# Altium PCB PCB_2020-02-17 18-44-55.pcbdoc
Units mm, origin at the board's own origin, x right, y up, seen from the top; angles counter-clockwise.
Board outline 88.52 x 69.47 mm, 2 copper layers (Top Layer, Bottom Layer); 12 components, 24 nets, 56 pads, 9 vias.
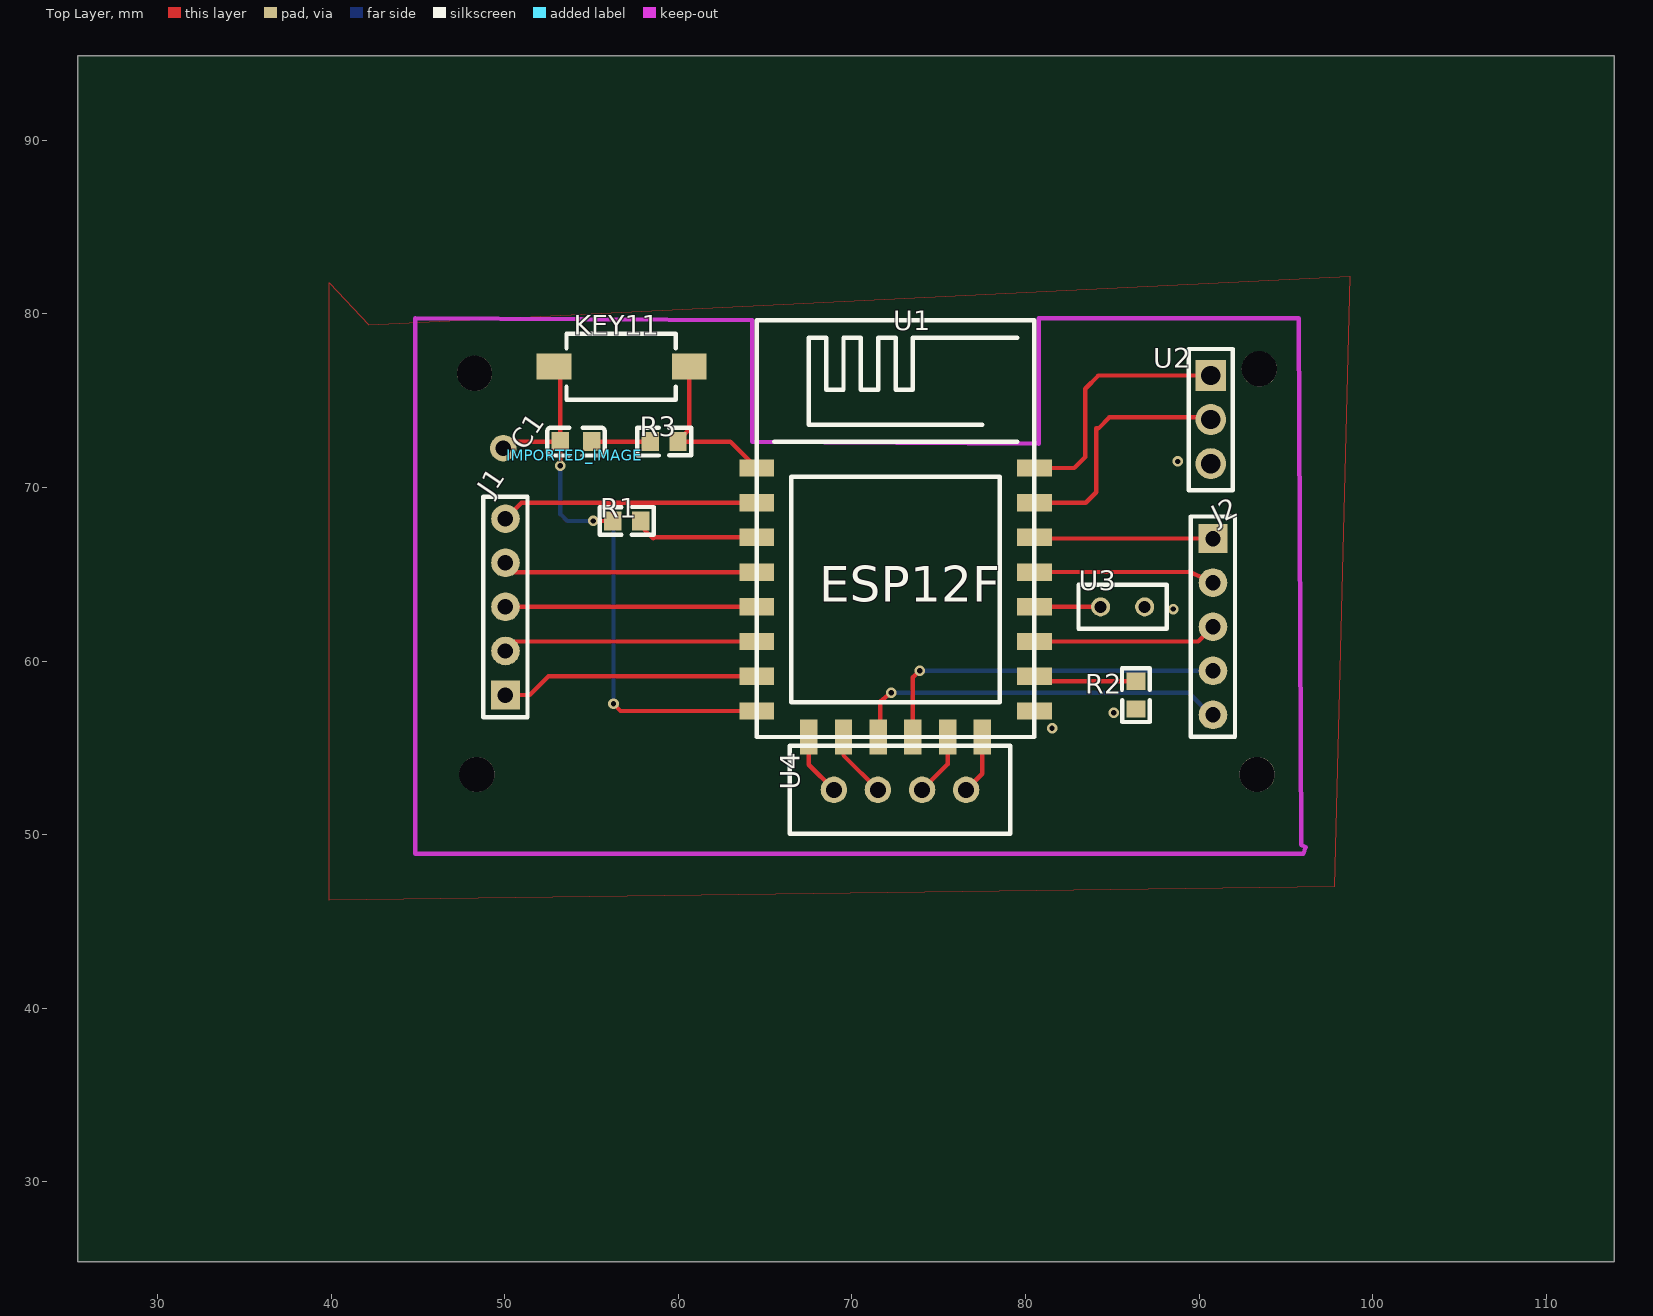
[diagram p0: Top Layer view]
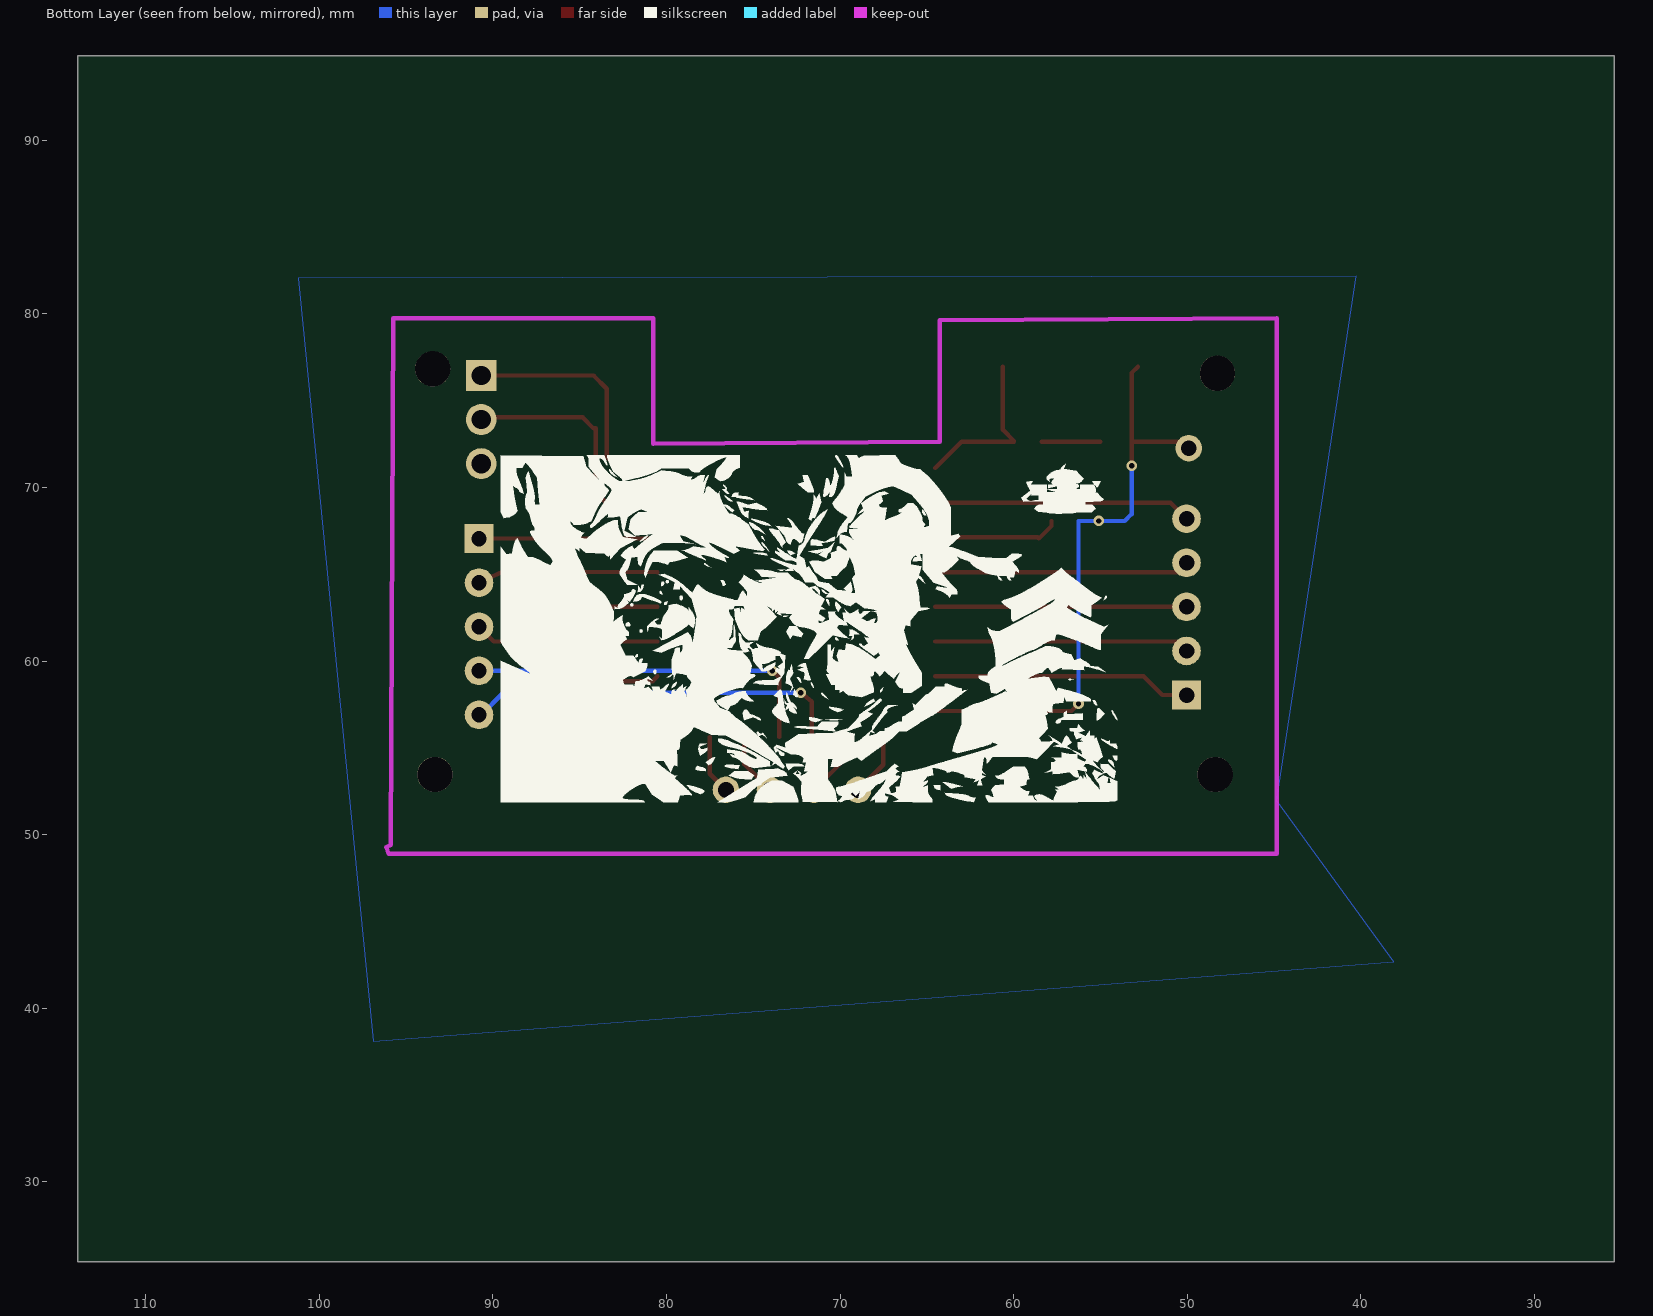
[diagram p1: Bottom Layer view, seen from below]

## Layer stack, top to bottom
Top Layer: signal copper (thickness not stored)
Dielectric: dielectric 0.32, FR-4, Dk 4.8
Bottom Layer: signal copper (thickness not stored)

## Board outline
113.919,25.4 25.4,25.4 25.4,94.869 113.919,94.869

## Components (designator, comment, footprint, x,y, rotation, side; value= is the part's Value field where it differs from the comment)
C1 "1u" C0603 54.102,72.644 r0 top
IMPORTED_IMAGE "IMPORTED_IMAGE" IMPORTED_IMAGE 54.018,71.86 r0 top
J1 "DIP-HEADER-5P-2.54" H5-2.54 50.038,63.119 r180 top
J2 "DIP-HEADER-5P-2.54" H5-2.54 90.805,61.976 r0 top
KEY11 "按键" 按键 52.832,76.962 r180 top
R1 "1k" R0603 57.023,68.072 r0 top
R2 "1k" R0603 86.36,58.039 r270 top
R3 "1k" R0603 59.182,72.644 r0 top
U1 "ESP-12F(ESP8266MOD)" WIFIM-SMD_ESP-12F-ESP8266MOD 72.517,63.373 r0 top
U2 "header3p" HEADER-3PIN 90.678,73.914 r270 top
U3 "header-2pin" HEADER_2_PIN 86.868,63.119 r180 top
U4 "Pin_Header_4P" PIN_HEADER_4P 72.771,52.578 r90 top

## Footprints (in the part's own frame and the unit in brackets; to place one, negate y for a bottom-side part, rotate by r counter-clockwise, add the part's x,y. Pads: shape width x height; smd on the part's side, far side on the other; paste and mask are expansions set on the pad)
C0603 [mm]
  rect 1x1.1 smd: 1(-0.9,0) 2(0.9,0)
  silkscreen extent -1.65,-0.8 1.65,0.8
H5-2.54 [mil]
  rect 65x65 hole 35: 1(0,200)
  round 65 hole 35: 2(0,100) 3(0,0) 4(0,-100) 5(0,-200)
  silkscreen extent -50,-250 50,250
HEADER-3PIN [mil]
  rect 70x70 hole 44: 1(-100,0)
  round 70 hole 44: 2(0,0) 3(100,0)
  silkscreen extent -160,-50 160,50
HEADER_2_PIN [mm]
  round 1.1 hole 0.701: 1(0,0) 2(2.54,0)
  silkscreen extent -1.27,-1.27 3.81,1.27
IMPORTED_IMAGE [mm]
PIN_HEADER_4P [mil]
  round 60 hole 36: 1(0,150) 2(0,50) 3(0,-50) 4(0,-150)
  silkscreen extent -100,-250 100,250
R0603 [mm]
  rect 1x1.1 smd: 1(-0.8,0) 2(0.8,0)
  silkscreen extent -1.55,-0.8 1.55,0.81
WIFIM-SMD_ESP-12F-ESP8266MOD [mm]
  rect 2x1 smd: 1(-8.002,7.751) 2(-8.002,5.751) 3(-8.002,3.751) 4(-8.002,1.751) 5(-8.002,-0.25) 6(-8.002,-2.25) 7(-8.002,-4.249) 8(-8.001,-6.249) 9(7.999,-6.249) 10(8,-4.249) 11(8.002,-2.25) 12(8.001,-0.25) 13(8,1.751) 14(8.001,3.751) 15(8,5.751) 16(8.001,7.751)
  rect 1x2 smd: 17(-5,-7.751) 18(-3.002,-7.749) 19(-1.003,-7.749) 20(0.998,-7.749) 21(2.997,-7.749) 22(4.997,-7.75)
  silkscreen extent -8,-7.75 8,16.25
按键 [mm]
  rect 2x1.5 smd: 1(0,0) 2(-7.8,0)
  silkscreen extent -7.03,-1.9 -0.73,1.9

## Free pads (board coordinates)
  round 1.524 hole 0.914: 1(49.911,72.263)
  round 2.032 hole 2.032 unplated: ""(48.26,76.581) ""(48.387,53.467) ""(93.345,53.467) ""(93.472,76.835)

## Via types
v1: diameter 0.61, hole 0.305, Top Layer to Bottom Layer, 9 vias

## Nets (pads, with @x,y where several pads share a name; then routed paths per layer and width w, separated by ;. In a path a pad name is that pad's centre, name@x,y a point inside that pad or via, vN(x,y) a via of type N, cw(c..) or ccw(c..) an arc to the next point about the centre after c; other vN are vias at no path point)
GND: R2.2 U1.9 U2.3 U3.1
  other v1: 81.534,56.134 85.09,57.023 88.519,62.992 88.773,71.501
NETPORT1: J1.5 U1.2 | length 14.9
  Top Layer w0.25: J1.5 50.963,69.124 U1.2
NETPORT2: J1.4 U1.4 | length 14.7
  Top Layer w0.25: J1.4 50.573,65.124 U1.4
NETPORT3: J1.3 U1.5 | length 14.5
  Top Layer w0.25: J1.3 50.043,63.124 U1.5
NETPORT4: J1.2 U1.6 | length 14.7
  Top Layer w0.25: J1.2 50.583,61.124 U1.6
NETPORT5: J1.1 U1.7 | length 14.9
  Top Layer w0.25: J1.1 51.435,58.039 52.52,59.124 U1.7
NETPORT6: J2.5 U1.19 | length 22
  Top Layer w0.25: U1.19 71.628,55.738 71.628,57.658 v1(72.263,58.166)
  Bottom Layer w0.25: v1(72.263,58.166) 89.408,58.166 90.678,56.896 J2.5
NETPORT7: J2.4 U1.20 | length 20.9
  Top Layer w0.25: U1.20 73.515,58.58 73.515,59.073 v1(73.914,59.436)
  Bottom Layer w0.25: v1(73.914,59.436) J2.4
NETPORT8: J2.3 U1.11 | length 10.6
  Top Layer w0.25: U1.11 89.953,61.124 J2.3
NETPORT9: J2.2 U1.13 | length 10.4
  Top Layer w0.25: U1.13 89.408,65.151 J2.2
NETPORT10: J2.1 U1.14 | length 10.3
  Top Layer w0.25: U1.14 80.585,67.056 J2.1
R3_1: C1.2 R3.1 | length 3.4
  Top Layer w0.25: C1.2 R3.1
S$26: 
U1_1: KEY11.2 R3.2 U1.1 | length 9.8
  Top Layer w0.25: KEY11.2 60.632,73.332 59.982,72.682 R3.2 62.995,72.644 U1.1
U1_3: R1.2 U1.3 | length 7.3
  Top Layer w0.25: R1.2 57.823,67.78 58.547,67.056 58.615,67.124 U1.3
U1_10: R2.1 U1.10 | length 6
  Top Layer w0.25: U1.10 80.802,58.839 R2.1
U1_12: U1.12 U3.2 | length 3.8
  Top Layer w0.25: U1.12 U3.2
U1_15: U1.15 U2.2 | length 14.4
  Top Layer w0.25: U1.15 83.475,69.124 84.074,69.723 84.074,73.406 84.201,73.406 84.836,74.041 90.551,74.041 U2.2
U1_16: U1.16 U2.1 | length 14.7
  Top Layer w0.25: U1.16 82.807,71.123 83.439,71.755 83.439,75.692 84.201,76.454 U2.1
U1_17: U1.17 U4.1 | length 3.6
  Top Layer w0.25: U1.17 67.517,54.022 U4.1
U1_18: U1.18 U4.2 | length 3.9
  Top Layer w0.25: U1.18 69.515,54.564 U4.2
U1_21: U1.21 U4.3 | length 3.7
  Top Layer w0.25: U4.3 75.514,54.051 U1.21
U1_22: U1.22 U4.4 | length 3.4
  Top Layer w0.25: U4.4 77.514,53.511 U1.22
VCC: C1.1 KEY11.1 pad.1 R1.1 U1.8 | length 35.4
  Top Layer w0.25: pad.1 50.292,72.644 C1.1 ; KEY11.1 53.202,76.592 53.202,75.427 C1.1 ; v1(53.202,71.247) C1.1 ; v1(55.104,68.072) R1.1 ; v1(56.261,57.531) 56.668,57.124 U1.8
  Bottom Layer w0.25: v1(53.202,71.247) 53.202,68.464 53.594,68.072 v1(55.104,68.072) 56.261,68.072 v1(56.261,57.531)

## Polygon pours and split planes (outlines as drawn)
GND on Top Layer (solid): 98.679,82.169 97.79,46.99 39.878,46.228 39.878,81.788 42.164,79.375
GND on Bottom Layer (solid): 40.259,82.169 101.219,82.042 96.901,38.1 38.1,42.672 44.831,51.943

## Silkscreen, mask and mechanical layers (free items; w line width, h text height)
Document:
  lines w0.003: 69.634,60.109 69.685,60.16

## Text inside footprints (layer, text, board x,y; h text height)
U1: Top Overlay "ESP12F" at 68.115,63.407 h2.03